# Altium PCB rs485m.PcbDoc
Units mm, origin at the board's own origin, x right, y up, seen from the top; angles counter-clockwise.
Board outline 64 x 30 mm, 2 copper layers (Top Layer, Bottom Layer); 47 components, 40 nets, 173 pads, 0 vias.
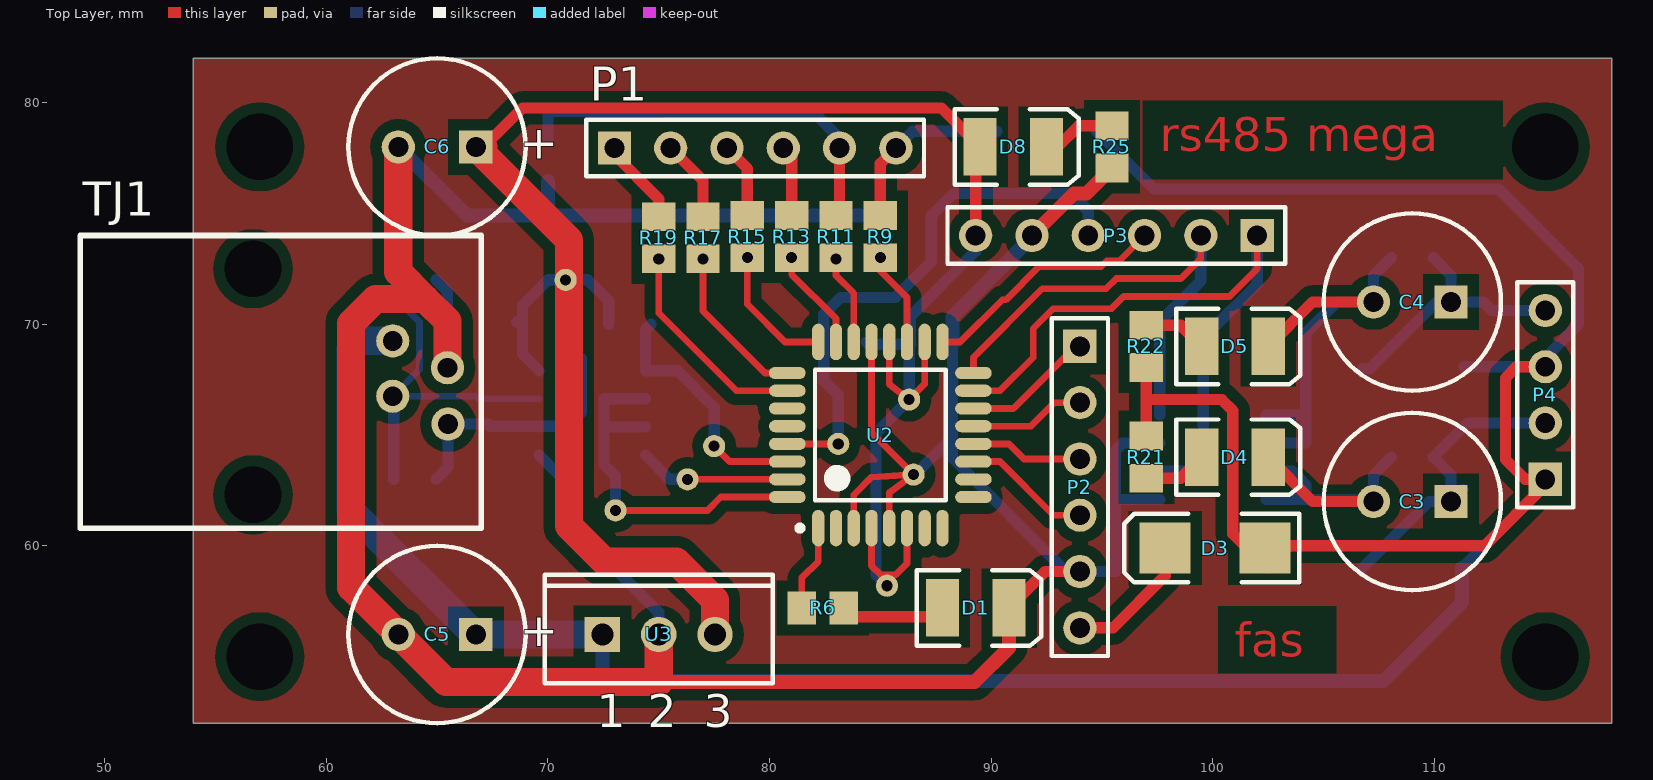
[diagram p0: Top Layer view]
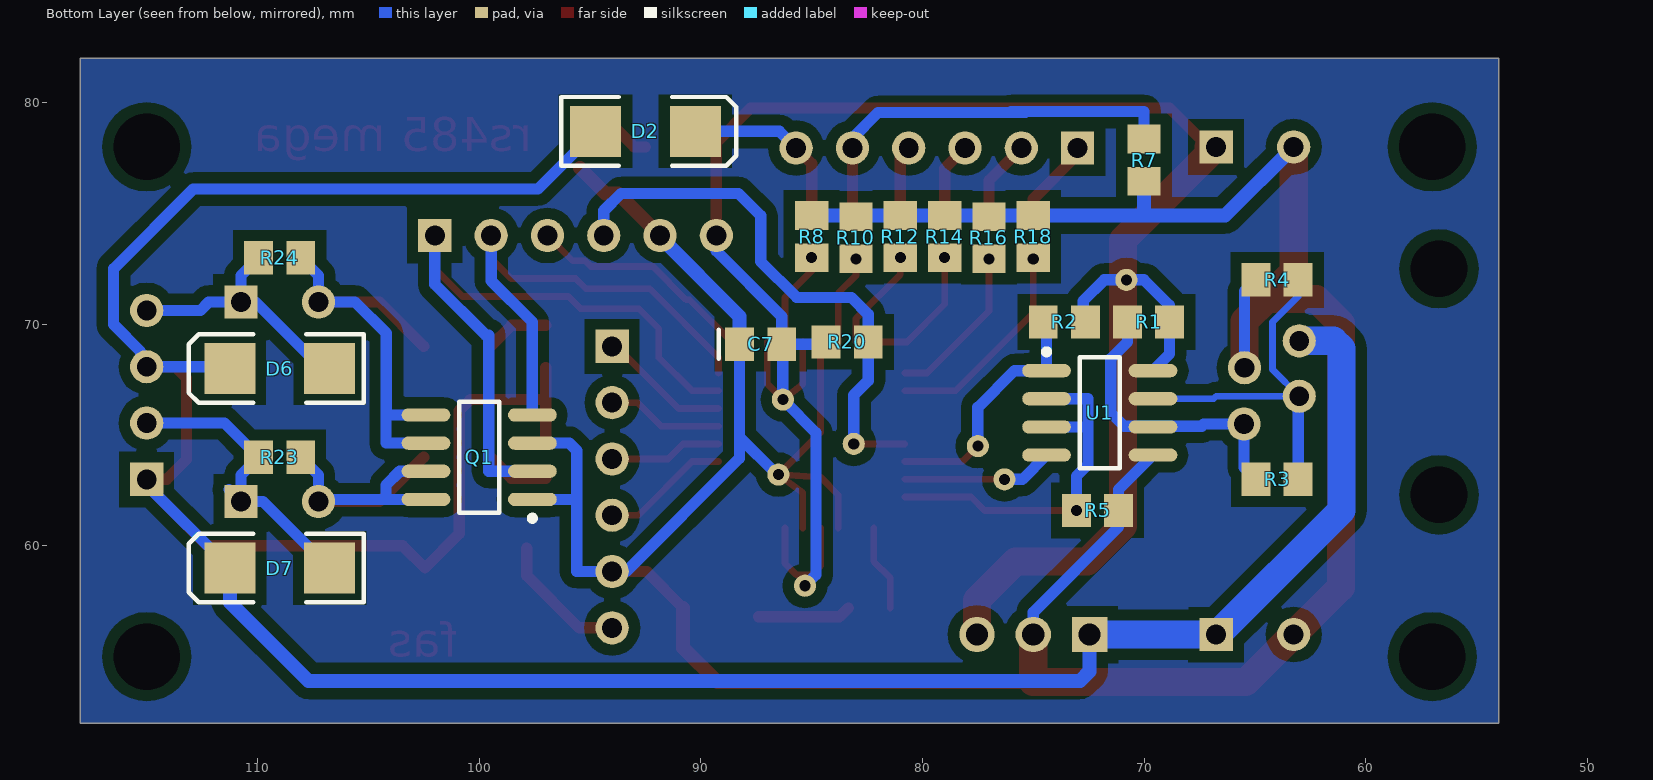
[diagram p1: Bottom Layer view, seen from below]

## Layer stack, top to bottom
Top Layer: signal copper 0.0356
Dielectric: dielectric 0.32, FR-4, Dk 4.8
Bottom Layer: signal copper 0.0356

## Board outline
54,52 118,52 118,82 54,82

## Design rules (kind name [scope] priority, off if disabled: settings)
Clearance [All] p1: gap=0.5
HoleSize [All] p1: absolutevalues=TRUE maxlimit=5.08 minlimit=0.025 maxpercent=80.000 minpercent=20.000
MinimumSolderMaskSliver [All] p1: minsoldermaskwidth=0.025
PolygonConnect [All] p1: connectstyle=Relief reliefconductorwidth=0.254 reliefentries=4 polygonreliefangle="90 Angle"
RoutingVias [All] p1: holewidth=0.711 width=1.27 viastyle="Through Hole" minholewidth=0.711 minwidth=1.27 maxholewidth=0.711 maxwidth=1.27
SilkscreenOverComponentPads [All] p1: minsilkscreentomaskgap=0.127
SolderMaskExpansion [All] p1: expansion=0.102
Width [All] p1: maxlimit=5 minlimit=0.254 preferedwidth=0.254
25 further rules are at their usual default settings.

## Classes and differential pairs
component class max485: D1 R1 R2 R3 R4 R5 R6 TJ1 U1
component class rs485m: C3 C4 C5 C6 C7 D2 D3 D4 D5 D6 D7 D8 P1 P2 P3 P4 Q1 R7 R8 R9 R10 R11 R12 R13 R14 R15 R16 R17 R18 R19 R20 R21 R22 R23 R24 R25 U2 U3

## Components (designator, comment, footprint, x,y, rotation, side; value= is the part's Value field where it differs from the comment)
C3 "94SH107X0016EBP" E 109,62 r180 top
C4 "94SH107X0016EBP" E 109,71 r180 top
C5 "94SH107X0016EBP" E 65,56 r180 top
C6 "94SH107X0016EBP" E 65,78 r180 top
C7 "C0805" 0805 87.3,69.1 r180 bottom
D1 "LED3" 3.5X2.8X1.9 89.3,57.2 r0 top
D2 "D Schottky" SMB 92.5,78.7 r180 bottom
D3 "D Schottky" SMB 100.1,59.9 r180 top
D4 "LED3" 3.5X2.8X1.9 101,64 r0 top
D5 "LED3" 3.5X2.8X1.9 101,69 r0 top
D6 "D Schottky" SMB 109,68 r0 bottom
D7 "D Schottky" SMB 109,59 r0 bottom
D8 "LED3" 3.5X2.8X1.9 91,78 r0 top
P1 "Header 6" HDR1X6 73,77.95 r0 top
P2 "Header 6" HDR1X6 94,69 r270 top
P3 "Header 6" HDR1X6 102,74 r180 top
P4 "Header 4" HDR1X4 115,63 r90 top
Q1 "IRF7313" SO-8_N 100,64 r0 bottom
R1 "ERAS" ERA-0805 69.8,70.1 r0 bottom
R2 "ERAS" ERA-0805 73.6,70.1 r0 bottom
R3 "ERAS" ERA-0805 64,63 r180 bottom
R4 "ERAS" ERA-0805 64,72 r0 bottom
R5 "ERAS" ERA-0805 72.1,61.6 r180 bottom
R6 "ERAS" ERA-0805 82.4,57.2 r0 top
R7 "ERAS" ERA-0805 70,77.4 r270 bottom
R8 "ERAS" ERA-0805 85,73.95 r90 bottom
R9 "ERAS" ERA-0805 85,73.95 r270 top
R10 "ERAS" ERA-0805 83,73.9 r90 bottom
R11 "ERAS" ERA-0805 83,73.95 r270 top
R12 "ERAS" ERA-0805 81,73.95 r90 bottom
R13 "ERAS" ERA-0805 81,73.95 r270 top
R14 "ERAS" ERA-0805 79,73.95 r90 bottom
R15 "ERAS" ERA-0805 79,73.95 r270 top
R16 "ERAS" ERA-0805 77,73.9 r90 bottom
R17 "ERAS" ERA-0805 77,73.9 r270 top
R18 "ERAS" ERA-0805 75,73.95 r90 bottom
R19 "ERAS" ERA-0805 75,73.9 r270 top
R20 "ERAS" ERA-0805 83.4,69.2 r180 bottom
R21 "ERAS" ERA-0805 97,64 r270 top
R22 "ERAS" ERA-0805 97,69 r90 top
R23 "ERAS" ERA-0805 109,64 r180 bottom
R24 "ERAS" ERA-0805 109,73 r180 bottom
R25 "ERAS" ERA-0805 95.45,78 r270 top
TJ1 "TJ4-6P4C" TJ4-6P4C 67,74 r180 top
U1 "MAX485ESA" NSO8_N 72,66 r180 bottom
U2 "ATmega8A-AU" 32A_N 85,65 r90 top
U3 "MC7805ACT" 221A-06 75,56 r0 top

## Footprints (in the part's own frame and the unit in brackets; to place one, negate y for a bottom-side part, rotate by r counter-clockwise, add the part's x,y. Pads: shape width x height; smd on the part's side, far side on the other; paste and mask are expansions set on the pad)
3.5X2.8X1.9 [mm] "SM LED; 2 C-Bend Leads; Body 3.5 x 2.8 x 1.9 mm, inc leads (LxWxH typ)"
  rect 1.5x2.6 smd: 1(-1.5,0) 2(1.5,0)
  silkscreen extent -2.65,-1.7 2.95,1.7
32A_N [mm] "Thin QFP, 32-Leads, Body 7x7mm, Pitch 0.8mm, IPC Medium Density"
  oval 1.65x0.55 smd: 1(-4.2,2.8) 2(-4.2,2) 3(-4.2,1.2) 4(-4.2,0.4) 5(-4.2,-0.4) 6(-4.2,-1.2) 7(-4.2,-2) 8(-4.2,-2.8) 17(4.2,-2.8) 18(4.2,-2) 19(4.2,-1.2) 20(4.2,-0.4) 21(4.2,0.4) 22(4.2,1.2) 23(4.2,2) 24(4.2,2.8)
  oval 0.55x1.65 smd: 9(-2.8,-4.2) 10(-2,-4.2) 11(-1.2,-4.2) 12(-0.4,-4.2) 13(0.4,-4.2) 14(1.2,-4.2) 15(2,-4.2) 16(2.8,-4.2) 25(2.8,4.2) 26(2,4.2) 27(1.2,4.2) 28(0.4,4.2) 29(-0.4,4.2) 30(-1.2,4.2) 31(-2,4.2) 32(-2.8,4.2)
  silkscreen extent -4.32,-2.95 2.95,3.75, body extent -3.5,-3.5 3.5,3.5, height 1.2
221A-06 [mm] "TO, Thru-Hole, Vertical, Heatsink Mounted; 3 In-Line Leads; Pitch 2.54 mm"
  rect 1.6x1.6 hole 1: 1(-2.54,0)
  round 1.6 hole 1: 2(0,0) 3(2.54,0)
  silkscreen extent -5.15,-2.2 5.15,2.7
0805 [mm] "Chip Capacitor; Body 2.0 x 1.2 mm (LxW typ)"
  rect 1.3x1.5 smd: 1(-0.95,0) 2(0.95,0)
  silkscreen extent -1.9,-0.65 -1.9,0.65
E [mm] "Capacitor, Electrolytic, Radial; Body 8 x 10.5 mm (Dia.xH typ); Pin Spacing 3.5 mm (typ)"
  rect 1.5x1.5 hole 0.9: 1(-1.75,0)
  round 1.5 hole 0.9: 2(1.75,0)
  silkscreen extent -4,-4 4,4
ERA-0805 [mm] "Chip Resistor; Body 2 x 1.3 mm (LxW typ)"
  rect 1.3x1.5 smd: 1(-0.95,0) 2(0.95,0)
HDR1X4 [mm] "Connector; Header; 4 Position"
  rect 1.5x1.5 hole 0.9: 1(0,0)
  round 1.5 hole 0.9: 2(2.54,0) 3(5.08,0) 4(7.62,0)
  silkscreen extent -1.27,-1.27 8.89,1.27
HDR1X6 [mm] "Connector; Header; 6 Position"
  rect 1.5x1.5 hole 0.9: 1(0,0)
  round 1.5 hole 0.9: 2(2.54,0) 3(5.08,0) 4(7.62,0) 5(10.16,0) 6(12.7,0)
  silkscreen extent -1.27,-1.27 13.97,1.27
NSO8_N [mm] "SOIC, 8-Leads, Body 4.9x3.9mm, Pitch 1.27mm, IPC Medium Density"
  oval 2.2x0.6 smd: 1(-2.4,1.905) 2(-2.4,0.635) 3(-2.4,-0.635) 4(-2.4,-1.905) 5(2.4,-1.905) 6(2.4,-0.635) 7(2.4,0.635) 8(2.4,1.905)
  silkscreen extent -2.53,-2.5 0.9,2.88, body extent -2.5,-2 2.5,2, height 1.75
SMB [mm] "DO-214-AA/SMB; 2 C-Bend Leads; Body 5.3 x 3.6 mm, inc. leads (LxW)"
  rect 2.3x2.3 smd: 1(-2.25,0) 2(2.25,0)
  silkscreen extent -3.8,-1.55 4.1,1.55
SO-8_N [mm] "SOIC, 8-Leads, Body 4.9x3.9mm, Pitch 1.27mm, IPC Medium Density"
  oval 2.2x0.6 smd: 1(-2.4,1.905) 2(-2.4,0.635) 3(-2.4,-0.635) 4(-2.4,-1.905) 5(2.4,-1.905) 6(2.4,-0.635) 7(2.4,0.635) 8(2.4,1.905)
  silkscreen extent -2.52,-2.5 0.9,2.88, body extent -2,-2.5 2,2.5, height 1.75
TJ4-6P4C [mm]
  round 1.524 hole 2.56: 0(10.3,11.7) 0(10.3,1.5)
  round 1.5 hole 0.9: 1(1.535,5.965) 2(4,4.75) 3(1.505,8.505) 4(4,7.25)
  silkscreen extent 0,0 18.1,13.2

## Part data
C3 C4 C5 C6: "Solid Aluminum Capacitor with Organic Semiconductor Electrolyte: 100uF, 16V, Bulk Pack"
C7: "Ceramic Chip Capacitor - Standard"
D1 D4 D5 D8: "Typical BLUE SiC LED"
D2 D3 D6 D7: "Schottky Diode"
P1 P2 P3: "Header, 6-Pin"
P4: "Header, 4-Pin"
Q1: "HEXFET Power MOSFET"
R1 R2 R3 R4 R5 R6 R7 R8 R9 R10 R11 R12 R13 R14 R15 R16 R17 R18 R19 R20 R21 R22 R23 R24 R25: "Metal Film Thermosensitive Chip Resistor, 0.56 Ohm to 10k Ohm Range, 5% Tolerance, 0805 Size, 0.1 W"
U1: "Low-Power, Slew-Rate-Limited RS-485/RS-422 Transceiver"
U2: "8-bit AVR Microcontroller, 8KB Flash, 512 Bytes EEPROM, 1KB SRAM, 32-pin TQFP, Industrial Grade (-40°C to 85°C)"
U3: "Three-Terminal Positive Voltage Regulator"

## Free pads (board coordinates)
  round 1 hole 0.5: 0(85,73) 0(86.3,66.6) 1(83,72.95) 2(81,73) 2(85.3,58.2) 3(79,73) 3(83.1,64.6) 4(77,72.95) 5(75,72.95) 6(76.3,63) 8(73.05,61.6) 9(70.8,72) 10(77.5,64.5) 13(86.5,63.216)
  round 1.524 hole 3: 10(57,55) 10(57,78) 10(115,55) 10(115,78)

## Nets (pads, with @x,y where several pads share a name; then routed paths per layer and width w, separated by ;. In a path a pad name is that pad's centre, name@x,y a point inside that pad or via, vN(x,y) a via of type N, cw(c..) or ccw(c..) an arc to the next point about the centre after c; other vN are vias at no path point)
+12V: C5.1 D2.1 D3.1 D6.2 D7.2 P4.1 P4.3 R21.1 R22.1 TJ1.2 U3.1 | length 142.6
  Top Layer w0.508: R21.1 97,66.6 ; R22.1 97,66.6 ; P4.3 113.71,68.08 113.2,67.57 113.2,63.9 114.1,63 P4.1 115,62.75 112.25,60 103.45,60 102.45,59 100.9,60.55 100.9,66.1 100.4,66.6 97,66.6
  Bottom Layer w0.508: D2.1 97.35,76.1 112.9,76.1 116.504,72.496 116.504,69.997 115.28,68.773 115.28,68.08 P4.3 D6.2@111.33,68.08 ; D7.2 115,62.75 P4.1
  Bottom Layer w0.635: U3.1 72.46,54.34 72.9,53.9 107.7,53.9 111.25,57.45 D7.2
  Bottom Layer w1.27: TJ1.2 61.45,69.25 61.1,68.9 61.1,61.6 66.7,56 C5.1 U3.1
GND: C5.2 C6.2 C7.1 D1.2 P2.5 P3.5 pad.13 Q1.1 Q1.3 R4.2 R5.2 R7.2 R8.2 R10.2 R12.2 R14.2 R16.2 R18.2 R25.2 TJ1.1 U1.5 U2.3 U2.5 U2.21 U3.2 | length 157.3
  Top Layer w0.305: U2.3 83.8,62.3 84.6,63.1 pad.13 ; U2.21 84.6,65.116 pad.13 ; U2.5 85.4,62.4 pad.13
  Top Layer w0.508: D1.2 92.44,58.84 P2.5
  Top Layer w0.635: 75,53.85 89.25,53.85 90.8,55.4 D1.2 ; P3.5 93.74,75.9 94.3,75.9 R25.2
  Top Layer w1.27: C6.2 63.25,72.35 64.465,71.135 ; TJ1.1 65.465,70.135 64.465,71.135 ; U3.2 75,53.85 65.4,53.85 C5.2 61.115,58.135 61.115,70.031 62.219,71.135 64.465,71.135
  Bottom Layer w0.508: R4.2 65.465,71.485 TJ1.1 ; U1.5 71.15,62.545 71.15,61.9 R5.2@71,61.75 ; R5.2 71.15,60.85 75,57 U3.2 ; pad.13 86.566,63.216 88.25,64.9 ; C7.1 88.25,64.9 ; 95.905,62.095 Q1.1 ; Q1.3 95.935,64.635 95.6,64.3 95.6,58.84 P2.5 93.365,58.84 88.25,63.955 88.25,64.9
  Bottom Layer w0.635: C6.2 66.35,74.9 R18.2 R14.2 R12.2 R8.2 ; 70,75 R7.2 ; C7.1 88.25,70.355 91.84,73.945 P3.5
NetC1_1: U2.8
NetC2_1: U2.7
NetC3_1: C3.1 D7.1 P4.2 R23.1 | length 14
  Bottom Layer w0.508: D7.1 109.75,62 C3.1 ; C3.1@111.29,62.54 C3.1 ; P4.2 111.49,65.54 R23.1 110.75,63.2 C3.1
NetC3_2: C3.2 D4.2 Q1.7 Q1.8 R23.2 | length 15.5
  Top Layer w0.508: D4.2 104.5,62 C3.2
  Bottom Layer w0.508: Q1.8 104.2,62.095 ; Q1.7 103.585,63.365 104.2,62.75 104.2,62.095 ; R23.2 107.25,63.2 C3.2 107.155,62.095 104.2,62.095
NetC4_1: C4.1 D6.1 P4.4 R24.1 | length 12
  Bottom Layer w0.508: D6.1 107.1,68 110.1,71 C4.1 ; R24.1 110.75,72.2 C4.1 ; P4.4 112.58,70.62 112.2,71 C4.1
NetC4_2: C4.2 D5.2 Q1.5 Q1.6 R24.2 | length 20.1
  Top Layer w0.508: D5.2 104.5,71 C4.2
  Bottom Layer w0.508: Q1.6 104.2,64.635 104.2,65.9 104.195,65.905 ; Q1.5 104.195,65.905 ; R24.2 107.25,72.2 C4.2 105.6,71 104.195,69.595 104.195,65.905
NetD1_1: D1.1 R6.2 | length 4.2
  Top Layer w0.508: R6.2 83.75,56.8 D1.1@87.4,56.8
NetD2_2: D2.2 P1.6 R9.1 | length 8.2
  Top Layer w0.508: R9.1 85,77.25 P1.6
  Bottom Layer w0.508: P1.6 86.45,78.7 D2.2
NetD3_2: D3.2 P2.6 | length 6.1
  Top Layer w0.508: P2.6 95.5,56.3 97.85,58.65 D3.2
NetD4_1: D4.1 R21.2 | length 2.9
  Top Layer w0.508: R21.2 98.55,63.05 D4.1
NetD5_1: D5.1 R22.2 | length 2.9
  Top Layer w0.508: R22.2 98.55,69.95 D5.1
NetD8_2: D8.2 R25.1 | length 3.3
  Top Layer w0.508: D8.2 93,78 93.95,78.95 R25.1
NetP1_1: P1.1 R19.1 | length 3.9
  Top Layer w0.508: P1.1 73,77.65 75,75.65 R19.1@75,74.9
NetP1_2: P1.2 R17.1 | length 3.7
  Top Layer w0.508: P1.2 77,76.49 R17.1
NetP1_3: P1.3 R15.1 | length 3.4
  Top Layer w0.508: P1.3 79,77.03 R15.1@79,74.95
NetP1_4: P1.4 R13.1 | length 3.2
  Top Layer w0.508: P1.4 81,77.57 R13.1@81,74.95
NetP1_5: P1.5 R7.1 R11.1 | length 19.1
  Top Layer w0.508: R11.1@83.16,74.85 P1.5
  Bottom Layer w0.508: R7.1 70,79.6 76,79.6 ; 75.35,79.55 82,79.55 83.16,78.39 P1.5
NetP2_1: P2.1 U2.14 | length 6
  Top Layer w0.305: U2.14 91,66.2 93.8,69 P2.1
NetP2_2: P2.2 U2.13 | length 5.2
  Top Layer w0.305: U2.13 91.8,65.4 92.86,66.46 P2.2
NetP2_3: P2.3 U2.12 | length 5.1
  Top Layer w0.305: U2.12 90.8,64.6 91.48,63.92 P2.3
NetP2_4: P2.4 U2.11 | length 5.8
  Top Layer w0.305: U2.11 90.4,63.8 92.82,61.38 P2.4
NetP3_1: P3.1 Q1.2 U2.15 | length 31
  Top Layer w0.305: U2.15 90.4,67 91.9,68.5 91.9,69.8 92.8,70.7 95.427,70.7 95.98,71.252 100.752,71.252 102,72.5 P3.1
  Bottom Layer w0.508: Q1.2 99.565,63.365 99.565,69.5 99.7,69.5 102,71.8 P3.1
NetP3_2: P3.2 Q1.4 U2.16 | length 22.7
  Top Layer w0.305: U2.16 89.2,68.5 92.3,71.6 95.189,71.6 95.646,72.057 98.557,72.057 99.46,72.96 P3.2
  Bottom Layer w0.508: Q1.4 97.6,70.1 99.46,71.96 P3.2
NetP3_3: P3.3 U2.17 | length 11.1
  Top Layer w0.305: U2.17 88.6,69.2 90.5,71.1 90.662,71.1 92.159,72.598 94.961,72.598 95.225,72.862 95.782,72.862 P3.3
NetP3_4: P3.4 pad.3@83.1,64.6 R20.2 U2.29 | length 24.8
  Top Layer w0.305: U2.29 82.6,64.6
  Bottom Layer w0.508: pad.3@83.1,64.6 83.1,66.8 82.45,67.45 R20.2 82.45,70.45 83.2,71.2 85.666,71.2 87.3,72.834 87.3,74.9 88.3,75.9 93.6,75.9 94.38,75.12 P3.4
NetR1_2: R1.2 R3.1 TJ1.3 U1.6 | length 13.4
  Bottom Layer w0.305: U1.6@69.565,65.4 U1.6@69.635,65.4
  Bottom Layer w0.508: R3.1 65.495,63.545 TJ1.3 67.305,65.495 67.4,65.4 U1.6@69.565,65.4 ; U1.6 69.635,65.4 70.9,65.4 71.5,66 71.5,68.45 70.75,69.2 R1.2@70.75,70
NetR2_2: pad.10@77.5,64.5 R2.2 U1.1 U2.30 | length 11.3
  Top Layer w0.305: pad.10@77.5,64.5 78.2,63.8 U2.30
  Bottom Layer w0.508: R2.2@74.65,70 74.4,69.75 U1.1 75.845,67.905 77.5,66.25 pad.10@77.5,64.5
NetR3_2: R3.2 R4.1 TJ1.4 U1.7 | length 16.6
  Bottom Layer w0.305: R4.1 63.05,71.25 64.202,70.098 64.202,67.952 TJ1.4 66.75,66.75 66.865,66.635 U1.7
  Bottom Layer w0.508: R3.2 TJ1.4@63.05,66.7
NetR5_1: pad.8 R5.1 U1.2 U1.3 U2.32 | length 17
  Top Layer w0.305: pad.8 77.2,61.6 77.8,62.2 U2.32
  Bottom Layer w0.508: pad.8 73.05,63.15 72.535,63.665 72.535,65.365 ; U1.3 72.535,65.365 ; U1.2 72.535,66.635 72.535,65.365
NetR6_1: R6.1 U2.1 | length 3.9
  Top Layer w0.305: R6.1 81.45,58.55 82.2,59.3 U2.1
NetR8_1: pad.0@85,73 R8.1 R9.2 U2.19 | length 4.3
  Top Layer w0.305: R9.2 85,72.4 86.2,71.2 U2.19
NetR10_1: pad.1 R10.1 R11.2 U2.22 | length 4.8
  Top Layer w0.305: pad.1 83,72.2 83.8,71.4 U2.22 ; R11.2@83,73.15 R11.2@83.5,72.65
NetR12_1: pad.2@81,73 R12.1 R13.2 U2.23 | length 4.6
  Top Layer w0.305: R13.2 81,72.25 83,70.25 U2.23
NetR14_1: pad.3@79,73 R14.1 R15.2 U2.24 | length 6
  Top Layer w0.305: R15.2 79,70.9 80.7,69.2 U2.24
NetR16_1: pad.4 R16.1 R17.2 U2.25 | length 7.3
  Top Layer w0.305: R17.2 77,70.6 79.8,67.8 U2.25
NetR18_1: pad.5 R18.1 R19.2 U2.26 | length 9.7
  Top Layer w0.305: R19.2 75,70.5 78.5,67 U2.26
NetU1_4: pad.6 U1.4 U2.31 | length 6.9
  Top Layer w0.305: pad.6 U2.31
  Bottom Layer w0.508: U1.4 75.495,63 pad.6
VCC: C6.1 C7.2 D8.1 P3.6 pad.0@86.3,66.6 pad.2@85.3,58.2 pad.9 R1.1 R2.1 R20.1 U1.8 U2.4 U2.6 U2.18 U2.20 U3.3 | length 97.2
  Top Layer w0.305: U2.4 84.6,59.1 85,58.7 85.7,58.7 86.2,59.2 U2.6 ; U2.20 85.4,67.3 86.3,66.6 87,67.3 U2.18
  Top Layer w0.508: C6.1@67.1,78 68.85,79.75 87.75,79.75 D8.1@89.3,78.2 ; P3.6 D8.1@89.3,78.2 ; D8.1 D8.1@89.3,78.2
  Top Layer w1.27: C6.1 C6.1@67.1,77.65 ; C6.1@67.1,78 C6.1@67.1,77.65 ; U3.3 77.54,57.56 75.8,59.3 72.55,59.3 70.95,60.9 70.95,73.8 C6.1@67.1,77.65
  Bottom Layer w0.508: R1.1@68.6,70.1 R1.1 ; U1.8 68.85,68.655 R1.1 ; R2.1@72.75,70 72.75,71.05 71.8,72 70,72 68.85,70.85 R1.1 ; R20.1 84.45,69.1 C7.2@86.3,69.1 ; pad.2@85.3,58.2 84.8,58.7 84.8,65.1 86.3,66.6 C7.2@86.3,69.1 ; P3.6 89.3,73.3 86.35,70.35 C7.2 C7.2@86.3,69.1
pads on no net: TJ1.0 U2.2 U2.9 U2.10 U2.27 U2.28

## Polygon pours and split planes (outlines as drawn)
no net on Top Layer "Top Layer-No Net" (solid, pour order 2): 118,82 118,52 54,52 54,82
no net on Bottom Layer "Top Layer-No Net" (solid, pour order 4): 54,82 118,82 118,52 54,52

## Other copper
Top Layer:
  text "rs485 mega" at 97.6,77.8 h1.52
  text "fas" at 101,55 h1.52

## Silkscreen, mask and mechanical layers (free items; w line width, h text height)
Mechanical 31:
  the board outline again, w0.254

## Text inside footprints (layer, text, board x,y; h text height)
C5: Top Overlay "+" at 70.475,56.75 h1.5 r180
C6: Top Overlay "+" at 70.475,78.75 h1.5 r180
U3: Top Overlay "3" at 77.04,51.825 h1.5; Top Overlay "2" at 74.5,51.825 h1.5; Top Overlay "1" at 72.21,51.825 h1.5